# Altium PCB PCB_VS1005-Pico_2024-02-04.pcbdoc
Units mil, origin at the board's own origin, x right, y up, seen from the top; angles counter-clockwise.
Board outline 6145 x 4947 mil, 2 copper layers (Top Layer, Bottom Layer); 83 components, 164 nets, 602 pads, 134 vias.
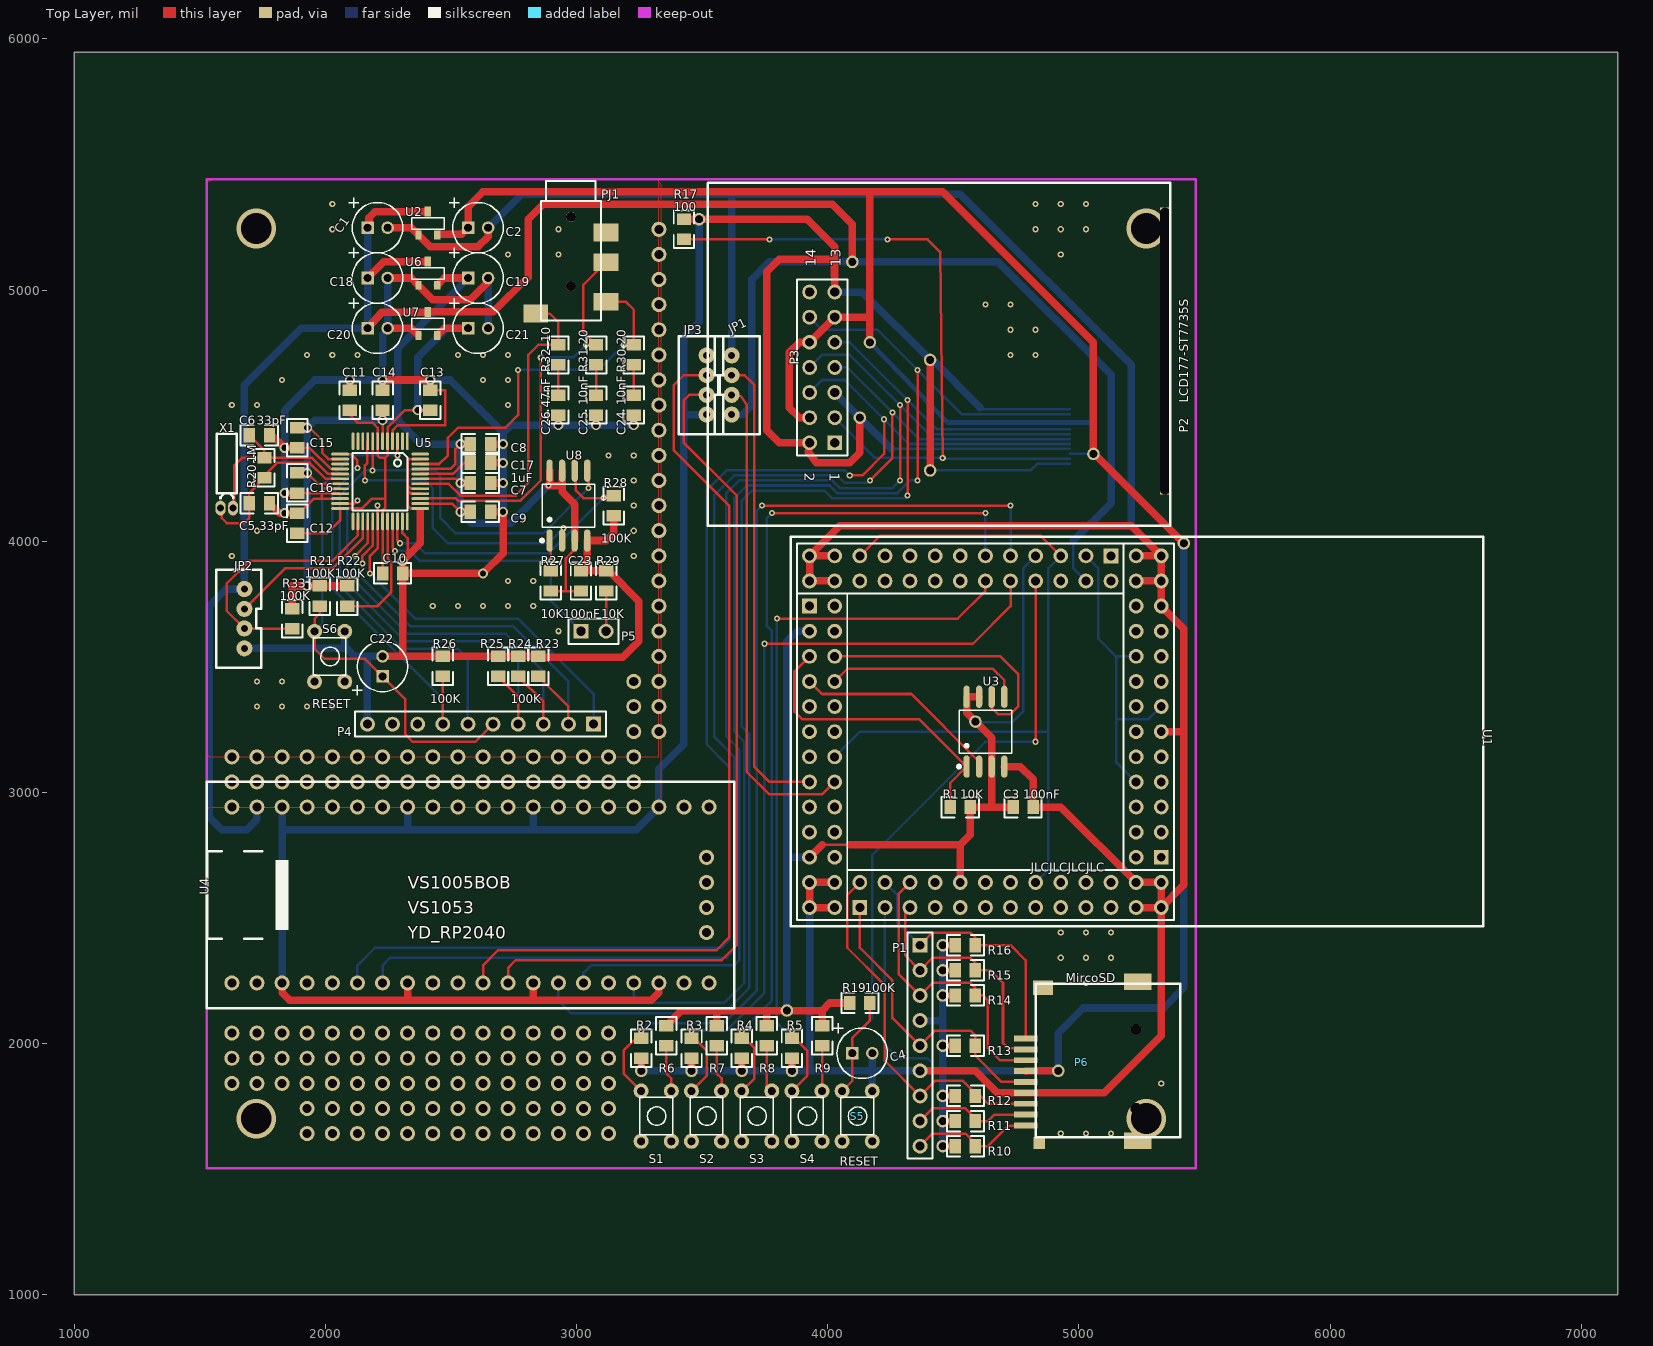
[diagram p0: Top Layer view]
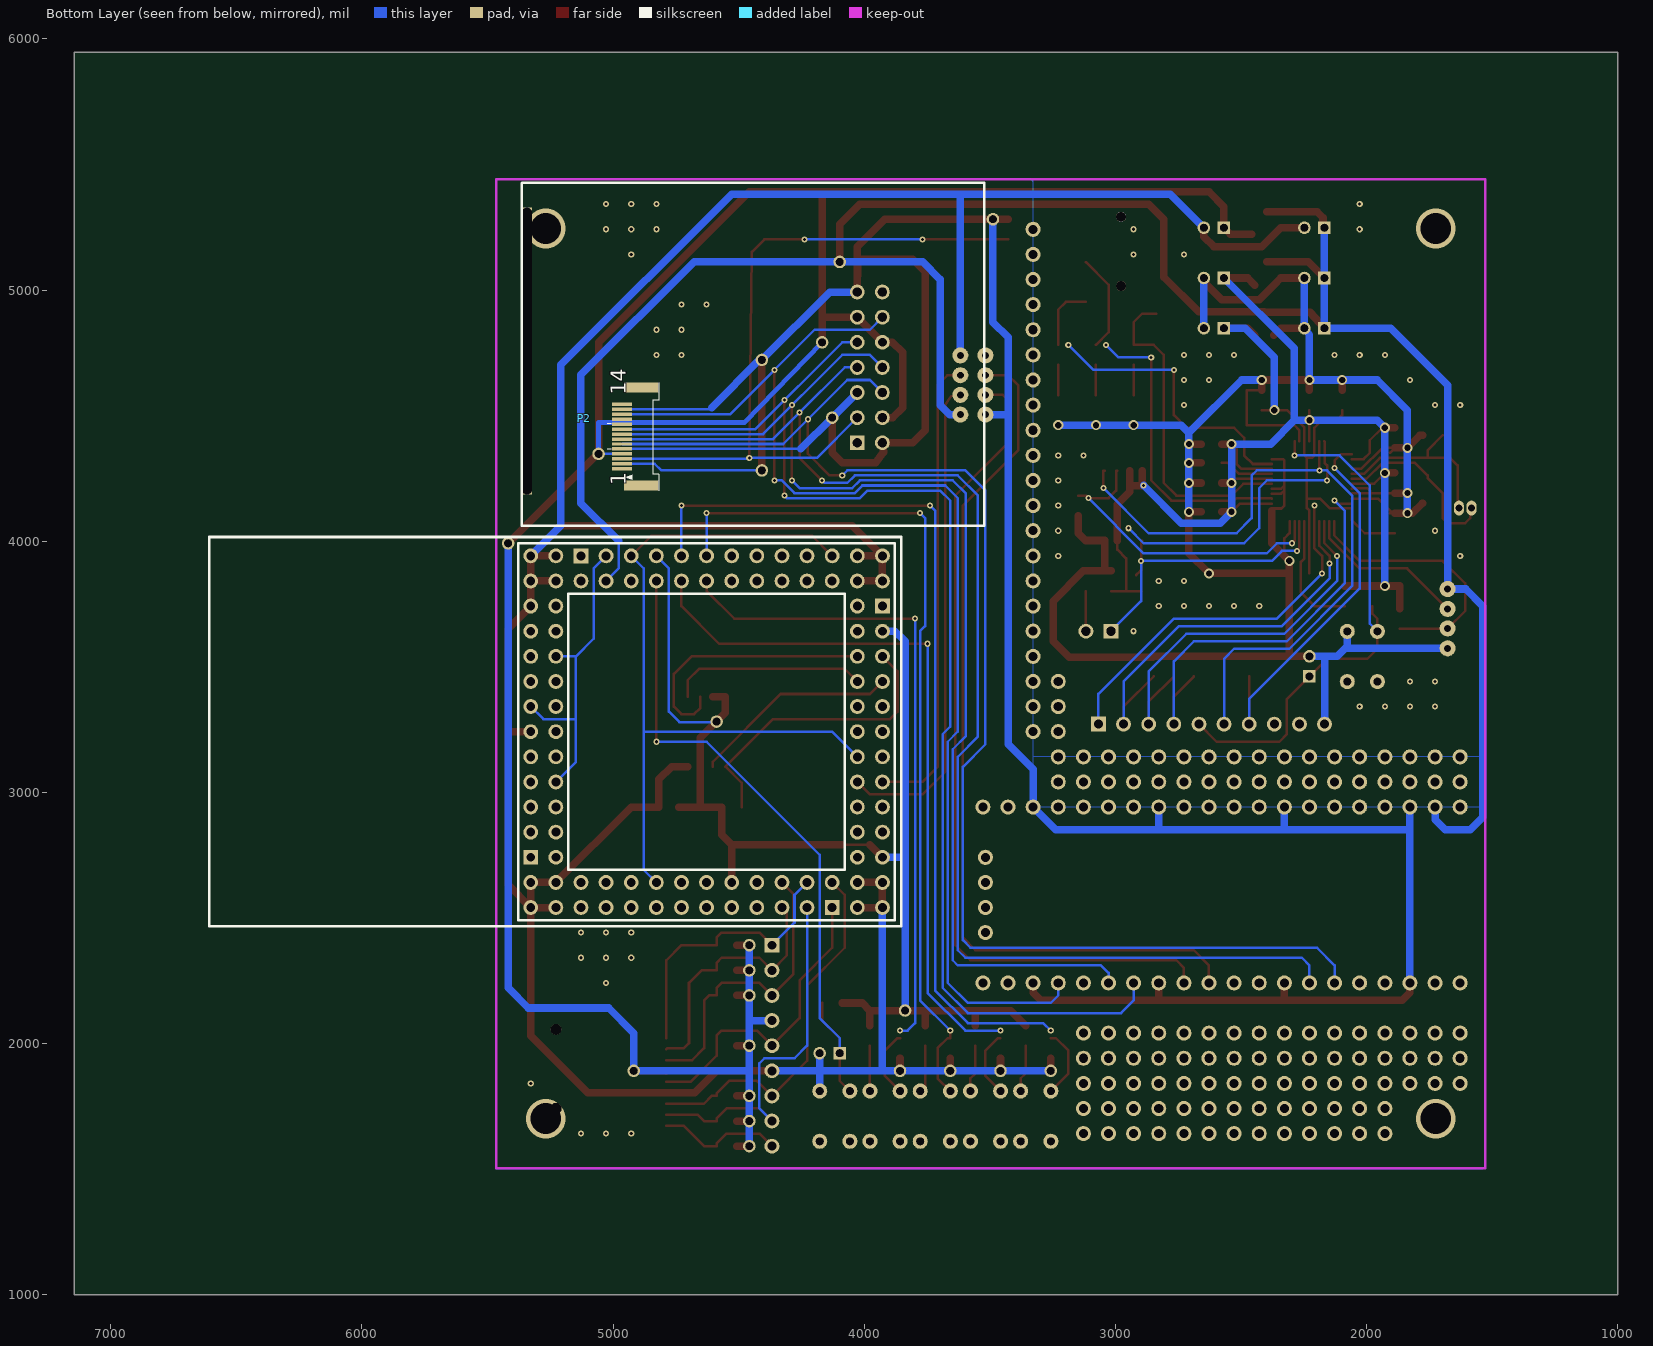
[diagram p1: Bottom Layer view, seen from below]

## Layer stack, top to bottom
Top Layer: signal copper (thickness not stored)
Dielectric: dielectric 12.6, FR-4, Dk 4.8
Bottom Layer: signal copper (thickness not stored)

## Board outline
7145,1000 1000,1000 1000,5947 7145,5947

## Components (designator, comment, footprint, x,y, rotation, side; value= is the part's Value field where it differs from the comment)
C1 "10uF" CAP-DIP 2207.96,5248.08 r0 top
C2 "10uF" CAP-DIP 2607.96,5248.08 r0 top
C3 "100nF" CAP-0805 4777.5,2942 r0 top
C4 "1uF" CAP-DIP 4137.5,1962 r0 top
C5 "33pF" CAP-0805 1737.5,4152 r0 top
C6 "33pF" CAP-0805 1737.5,4422 r0 top
C7 "100nF" CAP-0805 2617.5,4232 r0 top
C8 "100nF" CAP-0805 2617.5,4387 r0 top
C9 "100nF" CAP-0805 2617.5,4117 r0 top
C10 "100nF" CAP-0805 2267.5,3872 r0 top
C11 "100nF" CAP-0805 2097.5,4562 r90 top
C12 "100nF" CAP-0805 1887.5,4072 r90 top
C13 "100nF" CAP-0805 2417.5,4562 r90 top
C14 "100nF" CAP-0805 2227.5,4562 r90 top
C15 "100nF" CAP-0805 1887.5,4412 r270 top
C16 "100nF" CAP-0805 1887.5,4232 r270 top
C17 "1uF" CAP-0805 2617.5,4312 r0 top
C18 "10uF" CAP-DIP 2207.96,5048.08 r0 top
C19 "10uF" CAP-DIP 2607.96,5048.08 r0 top
C20 "10uF" CAP-DIP 2207.96,4848.08 r0 top
C21 "10uF" CAP-DIP 2607.96,4848.08 r0 top
C22 "1uF" CAP-DIP 2227.5,3502 r90 top
C23 "100nF" CAP-0805 3017.5,3842 r90 top
C24 "10nF" CAP-0805 3227.5,4542 r270 top
C25 "10nF" CAP-0805 3077.5,4542 r270 top
C26 "47nF" CAP-0805 2927.5,4542 r270 top
JP1 "UART_VS10XX" UART_VS10XX 3617.5,4622 r270 top
JP2 "UART_VS10XX" UART_VS10XX 1677.5,3692 r90 top
JP3 "UART_PICO" UART_VS10XX 3517.5,4622 r90 top
P1 "Header 9" HDR1X9 4367.5,2392 r270 top
P2 "LCD177-ST7735S" LCD177 4977.45,4442.02 r90 top
P3 "LCD28-ST7789" HDR2X7 4027.5,4392 r90 top
P4 "Header 10" HDR1X10 2617.5,3272 r180 top
P5 "SPIBOOT" HDR1X2 3017.5,3642 r0 top
P6 "MircoSD" MICROSD 5227.5,1742 r0 top
PJ1 "PJ3020D" PJ3020D 2977.5,5292 r270 top
R1 "10K" RES-0805 4527.5,2942 r0 top
R2 "10K" RES-0805 3257.5,1982 r90 top
R3 "10K" RES-0805 3457.5,1982 r90 top
R4 "10K" RES-0805 3657.5,1982 r90 top
R5 "10K" RES-0805 3857.5,1982 r90 top
R6 "10K" RES-0805 3357.5,2032 r90 top
R7 "10K" RES-0805 3557.5,2032 r90 top
R8 "10K" RES-0805 3757.5,2032 r90 top
R9 "10K" RES-0805 3977.5,2032 r90 top
R10 "10K" RES-0805 4547.5,1592 r180 top
R11 "10K" RES-0805 4547.5,1692 r180 top
R12 "10K" RES-0805 4547.5,1792 r180 top
R13 "10K" RES-0805 4547.5,1992 r180 top
R14 "10K" RES-0805 4547.5,2192 r180 top
R15 "10K" RES-0805 4547.5,2292 r180 top
R16 "10K" RES-0805 4547.5,2392 r180 top
R17 "100" RES-0805 3427.5,5242 r270 top
R19 "100K" RES-0805 4127.5,2162 r180 top
R20 "1M" RES-0805 1757.5,4292 r270 top
R21 "100K" RES-0805 1977.5,3782 r90 top
R22 "100K" RES-0805 2087.5,3782 r90 top
R23 "100K" RES-0805 2847.5,3502 r270 top
R24 "100K" RES-0805 2767.5,3502 r270 top
R25 "100K" RES-0805 2687.5,3502 r270 top
R26 "100K" RES-0805 2467.5,3502 r270 top
R27 "10K" RES-0805 2897.5,3842 r270 top
R28 "100K" RES-0805 3147.5,4142 r90 top
R29 "10K" RES-0805 3117.5,3842 r270 top
R30 "20" RES-0805 3227.5,4742 r90 top
R31 "20" RES-0805 3077.5,4742 r90 top
R32 "10" RES-0805 2927.5,4742 r90 top
R33 "100K" RES-0805 1867.5,3692 r90 top
S1 "UP" SW-4.5 3377.5,1812 r180 top
S2 "DOWN" SW-4.5 3577.5,1812 r180 top
S3 "D2" SW-4.5 3777.5,1812 r180 top
S4 "D3" SW-4.5 3977.5,1812 r180 top
S5 "RESET" SW-4.5 4177.5,1812 r180 top
S6 "RESET" SW-4.5 2077.5,3642 r180 top
U1 "VS1005BOB" VS1005BOB 4627.5,3242 r270 top
U2 "VOX6206" VOX6206 2407.96,5298.08 r0 top
U3 "GD25Q16CSIG" SOIC-8_L5.3-W5.3-P1.27-LS8.0-BL 4627.5,3242 r0 top
U4 "YD_RP2040" YD-RP2040 3127.5,2592 r90 top
U5 "VS1053" LQFP-48-VS1053 2227.5,4242 r270 top
U6 "VOX6206-3V3" VOX6206 2407.96,5098.08 r0 top
U7 "VOX6206-1V8" VOX6206 2407.96,4898.08 r0 top
U8 "25LC640" SOIC-8_L5.3-W5.3-P1.27-LS8.0-BL 2967.5,4142 r0 top
X1 "12.288MHz" CRYSTAL-TH_BD2.0-L6.0-P1.27 1607.5,4132 r270 top

## Footprints (in the part's own frame and the unit in brackets; to place one, negate y for a bottom-side part, rotate by r counter-clockwise, add the part's x,y. Pads: shape width x height; smd on the part's side, far side on the other; paste and mask are expansions set on the pad)
CAP-0805 [mm]
  rect 1.16x1.45 smd paste+0 mask+0.102: 1(-1.016,0) 2(1.016,0)
  silkscreen extent -1.9,-1.03 1.87,1.04
CAP-DIP [mil]
  rect 50x50 hole 30 slot 30.2 at 0 deg paste+0 mask+2: 1(-40,0)
  round 50 hole 30 slot 30.2 at 0 deg paste+0 mask+2: 2(40,0)
  silkscreen extent -115,-100 100,120
CRYSTAL-TH_BD2.0-L6.0-P1.27 [mm]
  oval 1.5x1 hole 0.7 paste+0 mask+0.05: 1(0,0.635) 2(0,-0.635)
  silkscreen extent -7.5,-1 -0.98,1
HDR1X2 [mm]
  rect 1.5x1.5 hole 0.9 slot 0.905 at 0 deg paste+0 mask+0.051: 1(0,0)
  round 1.5 hole 0.9 slot 0.905 at 0 deg paste+0 mask+0.051: 2(2.54,0)
  silkscreen extent -1.27,-1.27 3.81,1.27
HDR1X9 [mm]
  rect 1.5x1.5 hole 0.9 paste+0 mask+0.051: 1(0,0)
  round 1.5 hole 0.9 paste+0 mask+0.051: 2(2.54,0) 3(5.08,0) 4(7.62,0) 5(10.16,0) 6(12.7,0) 7(15.24,0) 8(17.78,0) 9(20.32,0)
  silkscreen extent -1.27,-1.27 21.59,1.27
HDR1X10 [mil]
  rect 59x59 hole 36 paste+0 mask+2: 1(-450,0)
  round 59 hole 36 paste+0 mask+2: 2(-350,0) 3(-250,0) 4(-150,0) 5(-50,0) 6(50,0) 7(150,0) 8(250,0) 9(350,0) 10(450,0)
  silkscreen extent -500,-50 500,50
HDR2X7 [mm]
  rect 1.5x1.5 hole 0.9 slot 0.905 at 0 deg paste+0 mask+0.051: 1(0.003,-0.007)
  round 1.5 hole 0.9 slot 0.905 at 0 deg paste+0 mask+0.051: 2(0.003,2.533) 3(2.543,-0.007) 4(2.543,2.533) 5(5.083,-0.007) 6(5.083,2.533) 7(7.623,-0.007) 8(7.623,2.533) 9(10.163,-0.007) 11(12.703,-0.007) 12(12.703,2.533) 13(15.243,-0.007) 14(15.243,2.533)
  round 1.5 hole 0.9 paste+0 mask+0.051: 10(10.163,2.533)
  silkscreen extent -1.27,-1.28 16.51,3.8
LCD177 [mm]
  rect 0.35x2 smd far side paste+0 mask+0.051: 1(-3.892,0.344) 2(-3.392,0.344) 3(-2.892,0.344) 4(-2.392,0.344) 5(-1.892,0.344) 6(-1.392,0.344) 7(-0.892,0.344) 8(-0.392,0.344) 9(0.108,0.344) 10(0.608,0.344) 11(1.108,0.344) 12(1.608,0.344) 13(2.108,0.344) 14(2.608,0.344)
  rect 1x3.5 smd far side paste+0 mask+0.051: 15(4.318,2.286) 16(-5.588,2.286)
  rect 29x1 hole 1 slot 29 at 0 deg paste+0 mask+0.051: 17(8.001,-9.271)
  silkscreen extent -9.65,-9.78 25.02,36.96
LQFP-48-VS1053 [mm]
  oval 1.8x0.28 smd paste+0 mask+0.051: 1(-3.967,2.51) 2(-3.967,2.01) 3(-3.967,1.51) 4(-3.967,1.01) 5(-3.967,0.51) 6(-3.967,0.01) 7(-3.967,-0.49) 8(-3.967,-0.99) 9(-3.967,-1.49) 10(-3.967,-1.99) 11(-3.967,-2.49) 12(-3.967,-2.99) 25(4.133,-2.99) 26(4.133,-2.49) 27(4.133,-1.99) 28(4.133,-1.49) 29(4.133,-0.99) 30(4.133,-0.49) 31(4.133,0.01) 32(4.133,0.51) 33(4.133,1.01) 34(4.133,1.51) 35(4.133,2.01) 36(4.133,2.51)
  oval 0.28x1.8 smd paste+0 mask+0.051: 13(-2.667,-4.29) 14(-2.167,-4.29) 15(-1.667,-4.29) 16(-1.167,-4.29) 17(-0.667,-4.29) 18(-0.167,-4.29) 19(0.333,-4.29) 20(0.833,-4.29) 21(1.333,-4.29) 22(1.833,-4.29) 23(2.333,-4.29) 24(2.833,-4.29) 37(2.833,3.81) 38(2.333,3.81) 39(1.833,3.81) 40(1.333,3.81) 41(0.833,3.81) 42(0.333,3.81) 43(-0.167,3.81) 44(-0.667,3.81) 45(-1.167,3.81) 46(-1.667,3.81) 47(-2.167,3.81) 48(-2.667,3.81)
  silkscreen extent -2.79,-3.05 3.05,2.54
MICROSD [mm]
  rect 2.35x0.6 smd paste+0 mask+0.051: 1(-11.163,7.079) 2(-11.163,5.979) 3(-11.163,4.879) 4(-11.163,3.779) 5(-11.163,2.679) 6(-11.163,1.579) 7(-11.163,0.479) 8(-11.163,-0.621) 9(-11.163,-1.721)
  round 1.092 hole 1.092 slot 1.097 at 0 deg paste+0 mask+0.051: 10(-0.013,0) 11(-0.013,8.001)
  rect 2.794x1.651 smd paste+0 mask+0.051: GND(0.167,-3.251) GND(0.167,12.809)
  rect 1.2x1.2 smd paste+0 mask+0.051: ""(-9.8,-3.5)
  rect 2.032x1.5 smd paste+0 mask+0.051: ""(-9.4,12.2)
  silkscreen extent -10.17,-2.92 4.46,12.59
PJ3020D [mm]
  rect 1.8x2.5 smd paste+0 mask+0.051: 2(1.6,3.55) 3(4.6,3.55) 4(8.6,3.55) 5(9.8,-3.55)
  round 1 hole 1 paste+0 mask+0.051: ""(0,0) ""(7,0)
  silkscreen extent -3.6,-3.05 10.5,3.05
RES-0805 [mm]
  rect 1.16x1.45 smd paste+0 mask+0.102: 1(-1.016,0) 2(1.016,0)
  silkscreen extent -1.9,-1.03 1.87,1.04
SOIC-8_L5.3-W5.3-P1.27-LS8.0-BL [mm]
  oval 0.63x2.25 smd paste+0 mask+0.051: 1(-1.905,-3.53) 2(-0.635,-3.53) 3(0.635,-3.53) 4(1.905,-3.53) 5(1.905,3.53) 6(0.635,3.53) 7(-0.635,3.53) 8(-1.905,3.53)
  silkscreen extent -2.82,-3.68 2.64,2.18
SW-4.5 [mil]
  round 60 hole 30 slot 30.2 at 0 deg paste+0 mask+2: 1(0.5,0.5) 2(120.5,0.5) 3(0.5,200.5) 4(120.5,200.5)
  silkscreen extent -5,26 126,176
UART_VS10XX [mil]
  round 64 hole 27.6 paste+0 mask+2: 1(-118,0) 2(-39,0) 3(39,0) 4(118,0)
  silkscreen extent -195,-67 195,111
VOX6206 [mil]
  rect 25x35 smd paste+0 mask+2: 1(-37.4,-78.74) 2(37.4,-78.74)
  rect 25x40 smd paste+0 mask+2: 3(0,15)
  silkscreen extent -65,-55 65,-10
VS1005BOB [mm]
  rect 1.5x1.5 hole 0.9 paste+0 mask+0.051: 1-1(12.7,17.78) 2-1(-17.78,12.7) 3-1(17.78,-12.7) 4-1(-12.7,-17.78)
  round 1.5 hole 0.9 paste+0 mask+0.051: 1-2(12.7,15.24) 1-3(10.16,17.78) 1-4(10.16,15.24) 1-5(7.62,17.78) 1-6(7.62,15.24) 1-7(5.08,17.78) 1-8(5.08,15.24) 1-9(2.54,17.78) 1-10(2.54,15.24) 1-11(0,17.78) 1-12(0,15.24) 1-13(-2.54,17.78) 1-14(-2.54,15.24) 1-15(-5.08,17.78) 1-16(-5.08,15.24) 1-17(-7.62,17.78) 1-18(-7.62,15.24) 1-19(-10.16,17.78) 1-20(-10.16,15.24) 1-21(-12.7,17.78) 1-22(-12.7,15.24) 1-23(-15.24,17.78) 1-24(-15.24,15.24) 1-25(-17.78,17.78) 1-26(-17.78,15.24) 2-2(-15.24,12.7) 2-3(-17.78,10.16) 2-4(-15.24,10.16) 2-5(-17.78,7.62) 2-6(-15.24,7.62) 2-7(-17.78,5.08) 2-8(-15.24,5.08) 2-9(-17.78,2.54) 2-10(-15.24,2.54) 2-11(-17.78,0) 2-12(-15.24,0) 2-13(-17.78,-2.54) 2-14(-15.24,-2.54) 2-15(-17.78,-5.08) 2-16(-15.24,-5.08) 2-17(-17.78,-7.62) 2-18(-15.24,-7.62) 2-19(-17.78,-10.16) 2-20(-15.24,-10.16) 2-21(-17.78,-12.7) 2-22(-15.24,-12.7) 2-23(-17.78,-15.24) 2-24(-15.24,-15.24) 2-25(-17.78,-17.78) 2-26(-15.24,-17.78) 3-2(15.24,-12.7) 3-3(17.78,-10.16) 3-4(15.24,-10.16) 3-5(17.78,-7.62) 3-6(15.24,-7.62) 3-7(17.78,-5.08) 3-8(15.24,-5.08) 3-9(17.78,-2.54) 3-10(15.24,-2.54) 3-11(17.78,0) 3-12(15.24,0) 3-13(17.78,2.54) 3-14(15.24,2.54) 3-15(17.78,5.08) 3-16(15.24,5.08) 3-17(17.78,7.62) 3-18(15.24,7.62) 3-19(17.78,10.16) 3-20(15.24,10.16) 3-21(17.78,12.7) 3-22(15.24,12.7) 3-23(17.78,15.24) 3-24(15.24,15.24) 3-25(17.78,17.78) 3-26(15.24,17.78) 4-2(-12.7,-15.24) 4-3(-10.16,-17.78) 4-4(-10.16,-15.24) 4-5(-7.62,-17.78) 4-6(-7.62,-15.24) 4-7(-5.08,-17.78) 4-8(-5.08,-15.24) 4-9(-2.54,-17.78) 4-10(-2.54,-15.24) 4-11(0,-17.78) 4-12(0,-15.24) 4-13(2.54,-17.78) 4-14(2.54,-15.24) 4-15(5.08,-17.78) 4-16(5.08,-15.24) 4-17(7.62,-17.78) 4-18(7.62,-15.24) 4-19(10.16,-17.78) 4-20(10.16,-15.24) 4-21(12.7,-17.78) 4-22(12.7,-15.24) 4-23(15.24,-17.78) 4-24(15.24,-15.24) 4-25(17.78,-17.78) 4-26(17.78,-15.24)
  silkscreen extent -19.69,-19.69 19.69,50.31
YD-RP2040 [mil]
  round 60 hole 36 paste+0 mask+2: 1(-350,1500) 2(-350,1400) 3(-350,1300) 4(-350,1200) 5(-350,1100) 6(-350,1000) 7(-350,900) 8(-350,800) 9(-350,700) 10(-350,600) 11(-350,500) 12(-350,400) 13(-350,300) 14(-350,200) 15(-350,100) 16(-350,0) 17(-350,-100) 18(-350,-200) 19(-350,-300) 20(-350,-400) 21(350,-400) 22(350,-300) 23(350,-200) 24(350,-100) 25(350,0) 26(350,100) 27(350,200) 28(350,300) 29(350,400) 30(350,500) 31(350,600) 32(350,700) 33(350,800) 34(350,900) 35(350,1000) 36(350,1100) 37(350,1200) 38(350,1300) 39(350,1400) 40(350,1500) 41(-150,-390) 42(-50,-390) 43(50,-390) 44(150,-390)
  silkscreen extent -450,-500 450,1600

## Free pads (board coordinates)
  round 60 hole 36 paste+0 mask+2: 1(1627.5,1842) 1(1627.5,1942) 1(1627.5,2042) 1(1627.5,3042) 1(1627.5,3142) 1(1727.5,1842) 1(1727.5,1942) 1(1727.5,2042) 1(1727.5,3042) 1(1727.5,3142) 1(1827.5,1842) 1(1827.5,1942) 1(1827.5,2042) 1(1827.5,3042) 1(1827.5,3142) 1(1927.5,1642) 1(1927.5,1742) 1(1927.5,1842) 1(1927.5,1942) 1(1927.5,2042) 1(1927.5,3042) 1(1927.5,3142) 1(2027.5,1642) 1(2027.5,1742) 1(2027.5,1842) 1(2027.5,1942) 1(2027.5,2042) 1(2027.5,3042) 1(2027.5,3142) 1(2127.5,1642) 1(2127.5,1742) 1(2127.5,1842) 1(2127.5,1942) 1(2127.5,2042) 1(2127.5,3042) 1(2127.5,3142) 1(2227.5,1642) 1(2227.5,1742) 1(2227.5,1842) 1(2227.5,1942) 1(2227.5,2042) 1(2227.5,3042) 1(2227.5,3142) 1(2327.5,1642) 1(2327.5,1742) 1(2327.5,1842) 1(2327.5,1942) 1(2327.5,2042) 1(2327.5,3042) 1(2327.5,3142) 1(2427.5,1642) 1(2427.5,1742) 1(2427.5,1842) 1(2427.5,1942) 1(2427.5,2042) 1(2427.5,3042) 1(2427.5,3142) 1(2527.5,1642) 1(2527.5,1742) 1(2527.5,1842) 1(2527.5,1942) 1(2527.5,2042) 1(2527.5,3042) 1(2527.5,3142) 1(2627.5,1642) 1(2627.5,1742) 1(2627.5,1842) 1(2627.5,1942) 1(2627.5,2042) 1(2627.5,3042) 1(2627.5,3142) 1(2727.5,1642) 1(2727.5,1742) 1(2727.5,1842) 1(2727.5,1942) 1(2727.5,2042) 1(2727.5,3042) 1(2727.5,3142) 1(2827.5,1642) 1(2827.5,1742) 1(2827.5,1842) 1(2827.5,1942) 1(2827.5,2042) 1(2827.5,3042) 1(2827.5,3142) 1(2927.5,1642) 1(2927.5,1742) 1(2927.5,1842) 1(2927.5,1942) 1(2927.5,2042) 1(2927.5,3042) 1(2927.5,3142) 1(3027.5,1642) 1(3027.5,1742) 1(3027.5,1842) 1(3027.5,1942) 1(3027.5,2042) 1(3027.5,3042) 1(3027.5,3142) 1(3127.5,1642) 1(3127.5,1742) 1(3127.5,1842) 1(3127.5,1942) 1(3127.5,2042) 1(3127.5,3042) 1(3127.5,3142) 1(3227.5,3042) 1(3227.5,3142) 1(3227.5,3242) 1(3227.5,3342) 1(3227.5,3442) 1(3327.5,3242) 1(3327.5,3342) 1(3327.5,3442) 1(3327.5,3542) 1(3327.5,3642) 1(3327.5,3742) 1(3327.5,3842) 1(3327.5,3942) 1(3327.5,4042) 1(3327.5,4142) 1(3327.5,4242) 1(3327.5,4342) 1(3327.5,4442) 1(3327.5,4542) 1(3327.5,4642) 1(3327.5,4742) 1(3327.5,4842) 1(3327.5,4942) 1(3327.5,5042) 1(3327.5,5142) 1(3327.5,5242)
  round 50 hole 30 slot 30.2 at 0 deg paste+0 mask+2: 2(3257.5,1892) 2(3457.5,1892) 2(3487.5,5282) 2(3657.5,1892) 2(3837.5,2132) 2(3857.5,1892) 2(4457.5,1592) 2(4457.5,1692) 2(4457.5,1792) 2(4457.5,1992) 2(4457.5,2192) 2(4457.5,2292) 2(4457.5,2392) 2(4587.5,3282) 2(4917.5,1892) 2(5057.5,4347.8)
  round 50 hole 30 slot 30.2 at 90 deg paste+0 mask+2: 2(4097.5,5112) 2(4127.5,4492) 2(4167.5,4792) 2(4407.5,4282) 2(4407.5,4722) 2(5417.5,3992)

## Via types
v1: diameter 24.41, hole 12.2, Top Layer to Bottom Layer, tented both sides, 103 vias
v2: diameter 40, hole 25, Top Layer to Bottom Layer, tented both sides, 23 vias
v3: diameter 157.48, hole 122.05, Top Layer to Bottom Layer, tented both sides, 4 vias
v4: diameter 24, hole 12, Top Layer to Bottom Layer, tented both sides, 4 vias

## Nets (pads, with @x,y where several pads share a name; then routed paths per layer and width w, separated by ;. In a path a pad name is that pad's centre, name@x,y a point inside that pad or via, vN(x,y) a via of type N, cw(c..) or ccw(c..) an arc to the next point about the centre after c; other vN are vias at no path point)
+3V3: C2.1 P1.4 P2.4 P2.10 P2.11 P3.4 P3.10 P3.11 P6.4 pad.2@4167.5,4792 pad.2@4457.5,1592 pad.2@4457.5,1692 pad.2@4457.5,1792 pad.2@4457.5,1992 pad.2@4457.5,2192 pad.2@4457.5,2292 pad.2@4457.5,2392 pad.2@4917.5,1892 pad.2@5057.5,4347.8 pad.2@5417.5,3992 R10.2 R11.2 R12.2 R13.2 R14.2 R15.2 R16.2 U2.2 | length 10803.7
  Top Layer w10: C2.1@2549.96,5248.08 C2.1
  Top Layer w30: U2.2@2457.5,5222 2541.9,5222 C2.1 2568,5332.5 2627.5,5392 4167.5,5392 ; P3.10 P3.11 ; P3.4 3887.4,4492.1 3847.5,4532 3847.5,4752 3887.6,4792.1 P3.10 ; P3.11 4167.5,4892.1 ; pad.2@4167.5,4792 4167.5,4892.1 ; 4167.5,4892 4167.5,4892.1 ; pad.2@4457.5,1592 R10.2 ; pad.2@4457.5,1692 R11.2 ; pad.2@4457.5,1792 R12.2 ; pad.2@4457.5,1992 R13.2 ; pad.2@4457.5,2192 R14.2 ; pad.2@4457.5,2292 R15.2 ; pad.2@4457.5,2392 R16.2 ; P6.4 4789.24,1892 pad.2@4917.5,1892 ; pad.2@5057.5,4347.8 5057.5,4792 4457.5,5392 4167.5,5392 ; pad.2@5057.5,4352 pad.2@5413.3,3996.2 ; 4167.5,4892.1 4167.5,5392
  Bottom Layer w10: P2.4@4963.9,4347.85 pad.2@5057.5,4347.85
  Bottom Layer w20: pad.2@4167.5,4792 4477.5,4472 5057.5,4472 pad.2@5057.5,4347.85
  Bottom Layer w30: P1.4 4457.5,2092 ; 4457.17,2092 4457.5,2091.67 ; pad.2@4457.5,1592 4457.5,1692 4457.5,1792 4457.5,1992 4457.5,2192 4457.5,2292 pad.2@4457.5,2392 ; 4457.5,1894.5 4457.5,1892 4917.5,1892 4917.5,2042 5017.5,2142 5337.5,2142 5417.5,2222 pad.2@5417.5,3992 ; pad.2@5057.5,4347.8 pad.2@5061.7,4347.8
AVDD: U1.1-8 U1.1-13 U1.1-18 U1.2-3 | length 1263.6
  Bottom Layer w10: U1.2-3 5077.5,3892 5077.5,3612 5147.5,3542 ; U1.1-8 5147.5,3122 5147.5,3292 ; U1.1-18 5147.5,3542 ; U1.1-13 5277.5,3292 5212.3,3292 5147.5,3292 ; 5147.5,3292 5147.5,3542
C24_1: C24.1 R30.1 | length 120
  Top Layer w10: C24.1 R30.1
C25_1: C25.1 R31.1 | length 120
  Top Layer w10: C25.1 R31.1
C26_1: C26.1 R32.1 | length 120
  Top Layer w10: C26.1 R32.1
CMD: P1.3 P6.3 R14.1 U1.3-6 | length 1202.1
  Top Layer w10: U1.3-6 4281.79,2596.29 4281.79,2277.71 P1.3 4417.5,2242 4567.5,2242 4587.5,2222 R14.1 4617.5,2192 4637.5,2172 4637.5,1982 4685.41,1934.09 P6.3
CS: P2.12 P3.12 U4.17 | length 4902.3
  Top Layer w10: v1(4357.5,4242) v1(4357.5,4682)
  Bottom Layer w10: U4.17 3227.5,2192 3257.5,2162 3587.5,2162 3667.5,2242 3667.5,3202 3627.5,3242 3627.5,4172 3677.5,4222 4007.5,4222 4037.5,4192 4277.5,4192 4327.5,4242 v1(4357.5,4242) ; P3.12 3977.8,4842.1 4197.4,4842.1 4534.2,4505.3 P2.12
CVDD: U1.2-5 U1.2-21 U1.3-16 U1.4-14 | length 3099.1
  Top Layer w10: U1.2-21 4207.5,4022 4847.5,4022 U1.2-5
  Bottom Layer w10: U1.4-14 4127.5,3242 4877.5,3242 ; U1.3-16 4877.5,2692.2 4877.5,3892 U1.2-5
D0: R2.2 S1.2 U1.2-9 | length 3934.6
  Top Layer w10: S1.2 3187.5,1881 3187.5,1972 3237.5,2022 R2.2 ; v1(3737.5,4142) v1(4727.5,4142)
  Bottom Layer w10: v1(3257.5,2052) 3287.5,2082 3587.5,2082 3717.5,2212 3717.5,4122 v1(3737.5,4142) ; U1.2-9 v1(4727.5,4142)
D1: R3.2 S2.2 U1.2-10 | length 3150.5
  Top Layer w10: S2.2 3517.5,1872 3517.5,1972 3467.5,2022 R3.2 ; v1(3747.5,3592) 4577.5,3592 4727.5,3742 U1.2-10
  Bottom Layer w10: v1(3457.5,2052) 3597.5,2052 3747.5,2202 v1(3747.5,3592)
D2: R4.2 S3.2 U1.2-11 | length 3434.3
  Top Layer w10: S3.2 3707.5,1862 3707.5,1982 3667.5,2022 R4.2 v1(3657.5,2052) ; v1(3777.5,4112) v1(4627.5,4112)
  Bottom Layer w10: v1(3657.5,2052) 3777.5,2172 3777.5,3642 3757.5,3662 3757.5,4092 v1(3777.5,4112) ; U1.2-11 v1(4627.5,4112)
D3: R5.2 S4.2 U1.2-12 | length 2864.3
  Top Layer w10: v1(3797.5,3692) 4517.5,3692 4627.5,3802 U1.2-12 ; S4.2 3917.5,1872 3917.5,1972 3867.5,2022 R5.2
  Bottom Layer w10: v1(3797.5,3692) 3797.5,2082 3827.5,2052 v1(3857.5,2052)
DC: P2.7 P3.7 U4.7 | length 5369.2
  Top Layer w10: v1(4167.5,4242) 4257.5,4332 v1(4257.5,4512)
  Bottom Layer w10: U4.7 2227.5,2312 2257.5,2342 3597.5,2342 3627.5,2372 3627.5,3142 3547.5,3222 3547.5,4182 3627.5,4262 4037.5,4262 4067.5,4232 4157.5,4232 v1(4167.5,4242) ; P3.7 4077.4,4692.1 v1(4257.5,4512) 4362.6,4406.9 P2.7
GND: C1.2 C2.2 C3.2 C4.2 JP1.1 P1.6 P6.6 pad.2@3257.5,1892 pad.2@3457.5,1892 pad.2@3657.5,1892 pad.2@3857.5,1892 R2.1 R3.1 R4.1 R5.1 S5.1 U1.1-11 U1.1-21 U1.1-23 U1.1-24 U1.1-25 U1.1-26 U1.2-23 U1.2-24 U1.2-25 U1.2-26 U1.3-23 U1.3-24 U1.3-25 U1.3-26 U1.4-23 U1.4-24 U1.4-25 U1.4-26 U2.1 U3.4 | length 14203.3
  Top Layer w10: P6.6 4845.29,1804.17
  Top Layer w30: C1.2 2341.8,5248.1 U2.1 2417.9,5172 2607.5,5172 2648,5212.5 C2.2 ; pad.2@3257.5,1892 R2.1 ; pad.2@3457.5,1892 R3.1 ; pad.2@3657.5,1892 R4.1 ; pad.2@3857.5,1892 R5.1 ; U1.4-26 U1.4-25 U1.4-23 U1.4-24 ; U1.2-24 U1.2-26 U1.2-25 ; U1.2-23 U1.2-25 ; P1.6 4587.5,1892 4675.3,1804.2 4845.3,1804.2 5099.7,1804.2 5327.5,2032 U1.3-25 ; U3.4 4766.48,3103.02 4817.5,3052 C3.2 4927.5,2942 U1.3-24 U1.3-26 U1.3-25 ; U1.3-23 U1.3-25 ; U1.1-24 U1.1-23 ; U1.1-26 U1.1-25 ; U1.2-25 4047.5,4062 5207.5,4062 U1.1-25 ; U1.3-25 5417.5,2632 5417.5,3242 ; U1.1-23 U1.1-21 5417.5,3652 5417.5,3242 ; U1.1-23 U1.1-25 ; 5417.5,3242 U1.1-11 5417.5,3242
  Bottom Layer w30: C2.2 2781.9,5382 3617.5,5382 ; pad.2@3257.5,1892 3457.5,1892 3657.5,1892 3857.5,1892 4177.5,1892 ; JP1.1 3617.5,5382 ; 3617.5,5274 3617.5,5382 ; U1.4-25 3927.5,1892 4177.5,1892 ; S5.1 4177.5,1812 C4.2 ; P1.6 4177.5,1892 ; U1.1-25 5207.5,4062 5207.5,4702 4527.5,5382 3617.5,5382 ; 4177.5,1892 C4.2 ; 4177.5,1892 C4.2 ; 4177.5,1892 C4.2
  other v1: 4927.5,1642 5027.5,1642 5127.5,1642 5327.5,1842 5027.5,2242 4927.5,2342 5027.5,2342 5127.5,2342 4927.5,2442 5027.5,2442 5127.5,2442 4727.5,4742 4827.5,4742 4727.5,4842 4827.5,4842 4627.5,4942 4727.5,4942 4927.5,5142 4827.5,5242 4927.5,5242 5027.5,5242 4827.5,5342 4927.5,5342 5027.5,5342
IOVDD: C3.1 pad.2@3837.5,2132 pad.2@4587.5,3282 R1.2 R6.2 R7.2 R8.2 R9.2 R19.2 U1.2-7 U1.3-10 U1.4-3 U1.4-21 U3.3 U3.7 U3.8 | length 5265
  Top Layer w10: 3977.5,2792 4087.5,2792 ; R19.2@4070.58,2162 R19.2
  Top Layer w30: R6.2 3417.5,2132 3977.5,2132 ; R7.2 3557.5,2112 3557.5,2132 ; R8.2 3757.5,2112 3757.5,2132 ; U1.4-21 3977.5,2792 ; R19.2 4007.5,2162 3977.5,2132 ; 4087.5,2792 4527.5,2792 ; U1.3-10 4527.5,2792 ; U3.7 U3.8 4552.5,3317 4652.5,3217 U3.3 4652.5,2942 ; C3.1 R1.2 4567.5,2832 4527.5,2792 ; 3977.5,2132 R9.2 3977.5,2132
  Bottom Layer w10: pad.2@4589.2,3280.3 4735.8,3280.3 4777.5,3322 4777.5,3892 U1.2-7
  Bottom Layer w30: pad.2@3837.5,2132 3837.5,2742 ; U1.4-3 3877.8,3642.3 3837.5,3602.5 3837.5,2742 ; 3837.5,2742 U1.4-21 3837.5,2742
JP1_2: JP1.2 U1.4-15 | length 1871
  Top Layer w10: JP1.2 3668.5,4661 3707.5,4622 3707.5,3102 3767.5,3042 U1.4-15
JP1_3: JP1.3 U1.4-16 | length 1947.4
  Top Layer w10: JP1.3 3654.2,4576.7 3677.5,4543.6 3677.5,3082 3767.5,2992 3977.7,2992 U1.4-16
JP3_4: JP3.4
MISO0: U1.4-7 U3.2 | length 826.8
  Top Layer w10: U1.4-7 3977.5,3392 4332.89,3392 4602.5,3122.39 U3.2
MOSI0: U1.4-8 U3.5 | length 780.4
  Top Layer w10: U1.4-8 4077.5,3492 4657.5,3492 4702.5,3447 U3.5
MOSI1: P2.8 P3.8 U4.15 | length 4786.5
  Top Layer w10: v1(4287.5,4242) 4287.5,4312 v1(4287.5,4542)
  Bottom Layer w10: U4.15 3027.5,2282 3057.5,2312 3627.5,2312 3647.5,2332 3647.5,3172 3595,3224.5 3595,4189.5 3647.5,4242 4017.5,4242 4047.5,4212 4257.5,4212 v1(4287.5,4242) ; P3.8 3977.6,4742 4087.5,4742 4402.9,4426.6 P2.8
P2_1: P2.1
P2_14: P2.14
P3_1: P3.1
P3_14: P3.14
P4_8: P4.8
P4_9: P4.9
PICO-GND: JP3.1 P2.2 P2.5 P2.13 P3.2 P3.5 P3.13 pad.2@3487.5,5282 pad.2@4127.5,4492 pad.2@4407.5,4282 pad.2@4407.5,4722 R17.1 U4.3 U4.8 U4.13 U4.18 U4.23 U4.28 U4.33 U4.38 | length 12742.4
  Top Layer w30: U4.3 1827.5,2202 1857.5,2172 2327.5,2172 ; U4.18 3327.5,2202 3297.5,2172 2827.5,2172 ; R17.1 3487.5,5282 3917.5,5282 4027.5,5172 4027.5,5052 ; 4026.5,5112 P3.13 ; 4026.5,5122 3807.5,5122 3757.5,5072 3757.5,4442 3807.4,4392.1 P3.2 3922.6,4355 3955,4312 4087.5,4312 4127.5,4352 pad.2@4127.5,4492 ; pad.2@4407.5,4282 pad.2@4407.5,4722 ; 2327.5,2172 U4.8 2327.5,2172 ; 2327.5,2172 2827.5,2172 ; 2827.5,2172 U4.13 2827.5,2172
  Bottom Layer w10: 4251.96,4367.54 P2.5 ; pad.2@4407.5,4282 4807.5,4282 4834,4308.5 P2.2 ; 4607.9,4525 P2.13
  Bottom Layer w30: U4.3@1837.5,2242 1827.5,2252 U4.38 1827.5,2852 2327.5,2852 ; pad.2@3487.5,5282 3487.5,4872 3427.5,4812 3427.5,4504 ; P3.5 4127.5,4492.37 4127.5,4492 4251.96,4367.54 ; P3.13 4137.4,4992.1 4407.5,4722 4417.5,4722 4607.5,4532 ; 2327.5,2852 U4.33 2327.5,2852 ; 2327.5,2852 2827.5,2852 ; 2827.5,2852 U4.28 2827.5,2852 ; 2827.5,2852 3238.4,2852 U4.23 3327.5,3091.6 3427.5,3191.6 3427.5,4504 ; 3427.5,4504 JP3.1 3427.5,4504
PICO-RX: JP3.2 U4.12 | length 3373
  Top Layer w10: U4.12 2727.5,2302 2757.5,2332 3577.5,2332 3637.5,2392 3637.5,4182 3427.5,4392 3427.5,4562 3448.5,4583 JP3.2@3527.5,4583
PICO-TX: JP3.3 U4.11 | length 3532.8
  Top Layer w10: U4.11 2627.5,2312 2687.5,2372 3557.5,2372 3607.5,2422 3607.5,2862 3607.5,2872 3607.5,4142 3387.5,4362 3387.5,4622 3426.5,4661 JP3.3
PJ1_2: PJ1.2
R6_1: R6.1 S1.1 | length 188.6
  Top Layer w10: R6.1 3357.5,1882 3377,1862.5 S1.1
R7_1: R7.1 S2.1 | length 188.6
  Top Layer w10: R7.1 3557.5,1882 3577,1862.5 S2.1
R8_1: R8.1 S3.1 | length 188.6
  Top Layer w10: R8.1 3757.5,1831 S3.1
R9_1: R9.1 S4.1 | length 180.5
  Top Layer w10: S4.1 R9.1
R17_2: P2.3 P3.3 R17.2 | length 2864.8
  Top Layer w10: R17.2 v1(3767.5,5202) ; v1(4237.5,5202) 4397.5,5202 4447.5,5152 v1(4457.5,4332)
  Bottom Layer w10: v1(3767.5,5202) v1(4237.5,5202) ; P3.3 4187.9,4332 v1(4457.5,4332) 4461.33,4328.17 P2.3
R29_2: P5.2 R29.2 | length 160
  Top Layer w10: P5.2 R29.2
RESET: P2.6 P3.6 U4.6 | length 5501.9
  Top Layer w10: v1(4087.5,4262) 4137.5,4262 4223.8,4348.3 v1(4223.77,4485.73)
  Bottom Layer w10: U4.6 2127.5,2312 2197.5,2382 3577.5,2382 3607.5,2412 3607.5,3102 3517.5,3192 3517.5,4202 3597.5,4282 4067.5,4282 v1(4087.5,4262) ; P3.6 3977.7,4642 4067.5,4642 v1(4223.77,4485.73) 4322.3,4387.2 P2.6
SCK: P1.5 P6.5 R13.1 U1.3-1 | length 1226.3
  Top Layer w10: U1.3-1 4127.5,2382 4257.5,2252 4257.5,2102 P1.5 4427.5,2052 4567.5,2052 4587.5,2032 R13.1 4587.5,1952 4692,1847.5 P6.5
SCLK0: U1.4-6 U3.6 | length 1060.8
  Top Layer w10: U1.4-6 4687.5,3542 4757.5,3472 4757.5,3342 4727.5,3312 4677.5,3312 4652.5,3337 U3.6
SCLK1: P2.9 P3.9 U4.14 | length 4997
  Top Layer w10: v1(4317.5,4182) v1(4317.5,4562)
  Bottom Layer w10: U4.14 2927.5,2172 2977.5,2122 3587.5,2122 3687.5,2222 3687.5,3232 3657.5,3262 3657.5,4162 3697.5,4202 3987.5,4202 4017.5,4172 4307.5,4172 v1(4317.5,4182) ; P3.9 4087.4,4792.1 4433.2,4446.3 P2.9
SD0: P1.7 P6.7 R12.1 U1.3-2 | length 1479.8
  Top Layer w10: U1.3-2 4077.5,2592 4077.5,2382 4227.5,2232 4227.5,1932 P1.7 4427.5,1852 4537.5,1852 4587.5,1802 R12.1 4607.5,1792 4638.6,1760.9 P6.7
SD1: P1.8 P6.8 R11.1 U1.3-3 | length 1498
  Top Layer w10: P1.8 4417.5,1742 4547.5,1742 4587.5,1702 R11.1 4637.5,1692 4663.1,1717.5 P6.8@4788,1717.5
  Bottom Layer w10: U1.3-3 4227.5,1992 4277.5,1942 4397.5,1942 4417.5,1922 4417.5,1742 P1.8
SD2: P1.1 P6.1 R16.1 U1.3-4 | length 1123.3
  Top Layer w10: P1.1 4417.5,2442 4567.5,2442 4587.5,2422 R16.1 4727.5,2392 4788,2331.5 P6.1
  Bottom Layer w10: U1.3-4 4277.5,2592 4277.5,2482 P1.1
SD3: P1.2 P6.2 R15.1 U1.3-5 | length 1033.5
  Top Layer w10: U1.3-5 4307.5,2522 4307.5,2352 P1.2 4417.5,2342 4567.5,2342 4587.5,2322 R15.1 4647.5,2292 4697.5,2242 4697.5,2002 4717.5,1982 4783.4,1982 P6.2
U1_1-1: U1.1-1
U1_1-2: U1.1-2
U1_1-3: U1.1-3
U1_1-4: U1.1-4
U1_1-5: U1.1-5
U1_1-6: U1.1-6
U1_1-7: U1.1-7
U1_1-9: U1.1-9
U1_1-10: U1.1-10
U1_1-12: U1.1-12
U1_1-14: U1.1-14
U1_1-15: U1.1-15
U1_1-16: U1.1-16
U1_1-17: U1.1-17
U1_1-19: U1.1-19
U1_1-20: U1.1-20
U1_1-22: U1.1-22
U1_2-1: U1.2-1
U1_2-2: U1.2-2
U1_2-6: U1.2-6
U1_2-13: U1.2-13
U1_2-14: U1.2-14
U1_2-15: U1.2-15
U1_2-16: U1.2-16
U1_2-17: U1.2-17
U1_2-18: U1.2-18
U1_2-19: U1.2-19
U1_2-20: U1.2-20
U1_2-22: U1.2-22
U1_3-7: U1.3-7
U1_3-8: U1.3-8
U1_3-9: U1.3-9
U1_3-11: U1.3-11
U1_3-12: U1.3-12
U1_3-13: U1.3-13
U1_3-14: U1.3-14
U1_3-15: U1.3-15
U1_3-17: U1.3-17
U1_3-18: U1.3-18
U1_3-19: U1.3-19
U1_3-20: U1.3-20
U1_3-21: U1.3-21
U1_3-22: U1.3-22
U1_4-1: U1.4-1
U1_4-2: U1.4-2
U1_4-4: U1.4-4
U1_4-9: U1.4-9
U1_4-10: U1.4-10
U1_4-11: U1.4-11
U1_4-12: U1.4-12
U1_4-13: U1.4-13
U1_4-17: U1.4-17
U1_4-18: U1.4-18
U1_4-19: U1.4-19
U1_4-20: U1.4-20
U1_4-22: U1.4-22
U4_1: U4.1
U4_2: U4.2
U4_4: U4.4
U4_5: U4.5
U4_9: U4.9
U4_10: U4.10
U4_16: U4.16
U4_19: U4.19
U4_20: U4.20
U4_21: U4.21
U4_22: U4.22
U4_24: U4.24
U4_25: U4.25
U4_26: U4.26
U4_27: U4.27
U4_29: U4.29
U4_30: U4.30
U4_31: U4.31
U4_32: U4.32
U4_34: U4.34
U4_35: U4.35
U4_36: U4.36
U4_37: U4.37
U4_40: U4.40
U4_41: U4.41
U4_42: U4.42
U4_43: U4.43
U4_44: U4.44
U5_1: U5.1
U5_2: U5.2
U5_3: C22.1 P4.5 R21.1 S6.2 U5.3 | length 2152
  Top Layer w10: S6.2 1957,3691.5 1977.5,3712 R21.1 ; S6.2@1957.5,3641.5 1957.5,3572 1997.5,3532 2157.5,3532 C22.1 2317.5,3372 2317.5,3232 2347.5,3202 2597.5,3202 P4.5 ; U5.3 2286.95,4342.55 v4(2287.5,4342)
  Bottom Layer w10: S6.2 1987.5,3672 1987.5,4222 2107.5,4342 v4(2287.5,4342)
U5_8: P4.6 U5.8 U8.5 | length 2749.8
  Top Layer w10: v4(2187.5,4282) 2188.5,4283 2188.5,4343 U5.8 ; U8.5 3047.5,4280.98 v1(3047.5,4212)
  Bottom Layer w10: P4.6 2567.5,3532 2527.5,3572 2307.5,3572 2057.5,3822 2057.5,4182 2157.5,4282 v4(2187.5,4282) 2437.5,4282 2457.5,4262 2457.5,4092 2517.5,4032 2867.5,4032 v1(3047.5,4212)
U5_9: U5.9 U8.2 | length 1173
  Top Layer w10: v1(2157.5,4242) 2157.5,4302 2167.5,4312 2167.5,4396.84 U5.9
  Bottom Layer w10: v1(2157.5,4242) 2397.5,4242 2427.5,4212 2427.5,4052 2487.5,3992 2887.5,3992 v1(2947.5,4052)
U5_10: U5.10
U5_11: U5.11
U5_12: U5.12
U5_13: P4.7 R26.2 U5.13 | length 1542.8
  Top Layer w10: U5.13 2102.3,4347 2127.5,4321.8 v4(2127.5,4292) ; P4.7 R26.2
  Bottom Layer w10: v4(2127.5,4292) 2027.5,4192 2027.5,3812 2467.5,3372 P4.7
U5_15: U5.15
U5_17: C6.1 R20.1 U5.17 X1.1 | length 746.9
  Top Layer w10: X1.1 1637.5,4137 1637.5,4302 1667.5,4332 R20.1 ; C6.1 1757.5,4362 R20.1 ; U5.17 2011.24,4268.26 1947.5,4332 R20.1
U5_18: C5.1 R20.2 U5.18 X1.2 | length 714.2
  Top Layer w10: X1.2 1587.5,4132 1587.5,4092 1607.5,4072 1677.5,4072 1697.5,4092 C5.1 1697.5,4192 R20.2 1757.5,4262 1807.5,4312 1937.5,4312 2000.5,4249 U5.18@2058.5,4249
U5_23: P4.4 R25.2 U5.23 | length 1701.9
  Top Layer w10: U5.23@2058.6,4150.15 2115.65,4150.15 v1(2127.5,4162) ; R25.2 2767.5,3382 P4.4
  Bottom Layer w10: v1(2127.5,4162) 2087.5,4122 2087.5,3832 2317.5,3602 2687.5,3602 2767.5,3522 P4.4
U5_25: U5.25
U5_26: JP2.2 R33.1 U5.26 | length 1055.2
  Top Layer w10: R33.1 1678.5,3652 JP2.2 1607.5,3723 1607.5,3832 1697.5,3922 2027.5,3922 2129.5,4024 U5.26
U5_27: JP2.3 U5.27 | length 654.4
  Top Layer w10: JP2.3 1838.5,3892 2027.5,3892 2149.2,4013.7 U5.27
U5_28: P4.3 R24.2 U5.28 | length 1599.1
  Top Layer w10: v1(2117.5,3942) 2168.8,3993.3 U5.28 ; R24.2 2867.5,3362 P4.3
  Bottom Layer w10: v1(2117.5,3942) 2117.5,3842 2327.5,3632 2717.5,3632 2867.5,3482 P4.3
U5_29: P4.2 R23.2 U5.29 | length 1643.8
  Top Layer w10: v1(2147.5,3912) 2147.5,3942 2188.52,3983.02 U5.29 ; R23.2 2967.5,3342 P4.2
  Bottom Layer w10: v1(2147.5,3912) 2147.5,3852 2337.5,3662 2747.5,3662 2967.5,3442 P4.2
U5_30: P4.1 U5.30 | length 1491.6
  Top Layer w10: v1(2177.5,3872) 2177.5,3942 2207.5,3972 U5.30@2207.5,4079.3 ; v4(2207.5,4142) 2208.21,4141.29 U5.30
  Bottom Layer w10: v1(2177.5,3872) 2357.5,3692 2767.5,3692 3067.5,3392 P4.1
U5_32: R22.1 U5.32 | length 485.2
  Top Layer w10: R22.1 2207.9,3742 2261.4,3796.7 2261.4,3918.1 2247.6,3931.9 U5.32
U5_33: P5.1 R27.1 U5.33 U8.1 | length 1240.8
  Top Layer w10: U5.33 2267.3,3972.2 v1(2277.5,3962) ; U8.1 2897.5,4003 v1(2897.5,3922) R27.1 2900.58,3882 R27.1@2917.5,3865.08
  Bottom Layer w10: v1(2277.5,3962) 2337.5,3962 2377.5,3922 v1(2897.5,3922) 2897.5,3762 P5.1
U5_34: R28.2 U5.34 U8.6 | length 1259.9
  Top Layer w10: U5.34 2287,4002.5 v1(2297.5,3992) ; U8.6 2997.5,4281 2997.5,4202 3027.5,4172 v1(3107.5,4172) 3117.5,4182 R28.2
  Bottom Layer w10: v1(2297.5,3992) 2357.5,3992 2397.5,3952 2887.5,3952 v1(3107.5,4172)
U5_36: U5.36
U5_39: PJ1.3 R31.2 U5.39 | length 1595.7
  Top Layer w10: U5.39 2379.7,4172 2517.5,4172 2527.5,4162 2777.5,4162 2857.5,4242 v1(2857.5,4732) ; R31.2 3027.5,4832 3027.5,5021.1 PJ1.3
  Bottom Layer w10: v1(2857.5,4732) 2987.5,4732 v1(3037.5,4782)
U5_42: PJ1.5 R32.2 U5.42 | length 1310.7
  Top Layer w10: U5.42 2490.6,4228.9 2537.5,4182 2757.5,4182 2807.5,4232 2807.5,4742 2847.5,4782 R32.2 2927.5,4872 2893.3,4906.2 PJ1.5
U5_44: C17.1 U5.44 | length 218.1
  Top Layer w10: U5.44 2508.8,4268.3 2552.5,4312 2556,4312 C17.1
U5_46: PJ1.4 R30.2 U5.46 | length 1417
  Top Layer w10: U5.46 2453.1,4307.6 2487.5,4342 2487.5,4412 2527.5,4452 2717.5,4452 2767.5,4502 v1(2767.5,4682) ; PJ1.4 3197.5,4953.42 3197.5,4952 3227.5,4922 R30.2
  Bottom Layer w10: v1(2767.5,4682) 3087.5,4682 v1(3187.5,4782)
U5_48: U5.48
VHIGH: C1.1 C18.1 C20.1 JP1.4 JP2.4 pad.2@4097.5,5112 U1.2-4 U2.3 U4.39 U6.3 U7.3 | length 9209.5
  Top Layer w30: C20.1 2225,4912 U7.3@2408,4912 ; C18.1 2233,5113.1 U6.3@2397.5,5112 ; C1.1@2173.6,5248.1 2173.6,5288.1 2197.5,5312 2357.5,5312 U2.3@2397.5,5312 ; U7.3 2668.6,4913.1 2807.5,5052 2807.5,5282 2867.5,5342 4017.5,5342 4097.5,5262 pad.2@4097.5,5112
  Bottom Layer w10: 4977.5,4002 4977.5,3892 U1.2-4
  Bottom Layer w30: U4.39 1727.5,2891.9 1687.6,2852 1587.5,2852 1537.5,2902 1537.5,3742 1605.5,3810 JP2.4 1677.5,4622 1903.6,4848.1 C20.1 ; C20.1 C18.1 C1.1 ; JP1.4 3659.5,4504 3697.5,4542 3697.5,5042 3767.5,5112 4097.5,5112 4677.5,5112 5127.5,4662 5127.5,4152 4977.5,4002
VS1053-CVDD: C10.1 C11.1 C12.1 C13.1 C21.1 U5.5 U5.7 U5.24 U5.31 U7.2 | length 2109.9
  Top Layer w10: C12.1 2007.5,4032 2058.6,4083.1 U5.24 ; U5.24 2146,4130.5 2185.3,4169.8 2237.5,4169.8 ; C11.1 2097.5,4502 2127.5,4472 2187.5,4472 2207.5,4452 2207.5,4342 2217.5,4332 2237.5,4332 ; C10.1 U5.31 2227.9,4122.4 2237.5,4132 2237.5,4332 ; C13.1 2378.08,4522 2317.5,4522 2247.6,4452.1 2247.6,4342.1 2237.5,4332
  Top Layer w30: U7.2 2474.1,4848.08 C21.1
  Bottom Layer w30: v2(2367.5,4522) 2367.5,4732 2483.6,4848.1 C21.1
VS1053-GND: C5.2 C6.2 C7.2 C8.2 C9.2 C10.2 C11.2 C12.2 C13.2 C14.2 C15.2 C16.2 C17.2 C18.2 C19.2 C20.2 C21.2 C22.2 C23.2 C24.2 C25.2 C26.2 JP2.1 P4.10 R23.1 R24.1 R25.1 R26.1 R28.1 R29.1 S6.1 U5.4 U5.16 U5.20 U5.21 U5.22 U5.35 U5.37 U5.40 U5.41 U5.47 U6.1 U7.1 U8.4 | length 10394.6
  Top Layer w10: C16.2 2056.12,4192 U5.21 ; C12.2@1907.5,4112 C12.2 1897.6,4112 1955.1,4169.8 U5.22 ; C15.2@1907.5,4352 C15.2 1937.5,4372 2021.6,4287.9 U5.16 ; 1986.27,4169.8 1986.27,4192 ; 1986.3,4192 1986.3,4200.8 1997.5,4212 2055.8,4212 U5.20 ; U5.4 2267.26,4441.76 2287.5,4462 2477.5,4462 2477.5,4602 C13.2 ; U5.35 2306.6,4032.9 2327.5,4012 2327.5,3942 v2(2307.5,3922) ; U5.37 2339.04,4130.46 2327.5,4142 2327.5,4202 ; U5.40 2340,4189.5 2327.5,4202 ; U5.41 2340.3,4209.2 2327.5,4222 ; U5.47 2332.81,4327.31 2327.5,4322 2327.5,4222 ; 2327.5,4202 2327.5,4222
  Top Layer w30: C5.2 1817.5,4112 v2(1837.5,4112) C12.2 ; C6.2 1787.5,4422 v2(1837.5,4372) C15.2 ; v2(1837.5,4192) C16.2 ; C11.2 v2(2097.5,4642) ; C22.2 R23.1 R24.1 R25.1 R26.1 ; C14.2 v2(2227.5,4642) v2(2417.5,4642) C13.2 ; C20.2 2341.82,4848.08 U7.1 ; C18.2 2341.82,5048.08 U6.1 2427.9,4962 2577.5,4962 2647.96,5032.46 C19.2 ; 2307.5,3542 C10.2 ; 2377.5,4122 2377.5,3992 v2(2307.5,3922) C10.2 ; C9.2 v2(2707.5,4117) 2707.5,3952 v2(2627.5,3872) C10.2 ; C7.2 v2(2707.5,4232) ; C8.2 v2(2707.5,4387) ; R23.1@2851.6,3538 3183.5,3538 3247.5,3602 3247.5,3762 R29.1@3127.5,3882 ; R29.1 C23.2 3042.5,3882 U8.4 3118.5,4003 3147.5,4032 R28.1 ; C17.2 v2(2707.5,4312) C17.2
  Bottom Layer w30: JP2.1 2077,3574 S6.1 2077,3582.5 2117.5,3542 C22.2 2167.5,3542 2167.5,3332 P4.10 ; v2(1837.5,4112) v2(1837.5,4192) v2(1837.5,4372) 1837.5,4522 1957.5,4642 v2(2097.5,4642) v2(2227.5,4642) 2227.5,4822 C20.2 ; C20.2 C18.2 ; v2(2417.5,4642) 2497.5,4642 2707.5,4432 ; C21.2 C19.2 ; v2(2707.5,4117) 2707.5,4192 v2(2707.5,4232) v2(2707.5,4312) v2(2707.5,4387) ; v2(3227.5,4462) v2(3077.5,4462) v2(2927.5,4462) 2737.5,4462 2707.5,4432 ; v2(2707.5,4387) 2707.5,4432 ; v2(2707.5,4387) 2707.5,4432
  other v1: 1727.5,3342 1827.5,3342 1927.5,3342 2027.5,3342 1727.5,3442 1827.5,3442 2927.5,3642 2427.5,3742 2527.5,3742 2627.5,3742 2727.5,3742 2827.5,3742 2727.5,3842 2827.5,3842 1627.5,3942 3227.5,3942 1727.5,4042 3227.5,4042 3227.5,4142 3227.5,4242 3127.5,4342 3227.5,4342 1627.5,4542 1727.5,4542 2727.5,4542 1827.5,4642 2627.5,4642 2727.5,4642 1927.5,4742 2027.5,4742 2127.5,4742 2527.5,4742 2627.5,4742 2727.5,4742 2727.5,5142 2927.5,5142 2027.5,5242 2927.5,5242 2027.5,5342
VS1053-IOVDD: C7.1 C8.1 C9.1 C14.1 C15.1 C16.1 C19.1 C23.1 R21.2 R22.2 R27.2 R33.2 U5.6 U5.14 U5.19 U5.38 U5.43 U5.45 U6.2 U8.3 U8.7 U8.8 | length 5344
  Top Layer w10: C16.1 v2@1937.5,4272 ; C15.1 v2(1927.5,4452) 1937.5,4452 1987.5,4402 1987.5,4352 2012.19,4327.31 U5.14 ; v2(1927.5,4272) 1970.61,4228.89 U5.19 ; C14.1 v2(2227.63,4481.87) U5.6 ; U5.38@2377.5,4150.15 2504.35,4150.15 v2(2537.5,4117) C9.1 ; U5.43 2520.93,4248.57 v2(2537.5,4232) C7.1 ; U5.45 2498.44,4287.94 2517.5,4307 2517.5,4367 v2(2537.5,4387) C8.1 ; R27.2 C23.1 ; 2956.3,3802 2957.5,3803.2 2957.5,3932 2992.5,3967 U8.3
  Top Layer w30: R33.2 1867.5,3822 v2(1927.5,3822) R21.2 R22.2 ; C16.1 v2(1927.5,4272) ; C15.1 v2(1927.5,4452) ; U6.2 2474.1,5048.08 C19.1 ; v2(2537.5,4117) C9.1 ; v2(2537.5,4232) C7.1 ; v2(2537.5,4387) C8.1 ; U8.8 2892.5,4222 v1(2887.5,4222) 2942.5,4221.7 ; U8.7 2942.5,4197 2992.5,4147 U8.3
  Bottom Layer w30: v2(1927.5,3822) v2(1927.5,4272) v2(1927.5,4452) 1957.37,4481.87 v2(2227.63,4481.87) ; v2(2227.63,4481.87) 2287.6,4481.9 2382.5,4387 v2(2537.5,4387) v2(2537.5,4232) v2(2537.5,4117) 2582.5,4072 2737.5,4072 v1(2887.5,4222) ; 2288.97,4481.9 2288.97,4769.1 C19.1
XCD: P1.9 P6.9 R10.1 | length 511.8
  Top Layer w10: P1.9 4417.5,1642 4547.5,1642 4587.5,1602 R10.1 ; R10.1@4597.5,1592 R10.1 ; P6.9 4719.7,1674.2 4637.5,1592 R10.1
XCS0: R1.1 U1.4-5 U3.1 | length 1208.5
  Top Layer w10: U1.4-5 3867.5,3482 3867.5,3322 3897.5,3292 4363.5,3292 U3.1 4487.5,3038.02 R1.1
XRST: C4.1 R19.1 S5.2 U1.2-8 | length 2695.8
  Top Layer w10: S5.2 4097.5,1852 C4.1 4097.5,2022 4167.5,2092 R19.1 ; v1(4827.5,3202) U1.2-8
  Bottom Layer w10: C4.1 4097.5,2022 4177.5,2102 4177.5,2752 4627.5,3202 v1(4827.5,3202)
pads on no net: P2.15 P2.16 P2.17 P6. P6.10 P6.11 P6.GND PJ1. S1.3 S1.4 S2.3 S2.4 S3.3 S3.4 S4.3 S4.4 S5.3 S5.4 S6.3 S6.4
copper on no net:
  other v3: 1724.35,1701.85 5267.65,1701.85 1724.35,5245.15 5267.65,5245.15

## Polygon pours and split planes (outlines as drawn)
VS1053-GND on Bottom Layer (solid): 3327.5,5442 1527.5,5442 1527.5,3152 1537.5,3142 3327.5,3142 3327.5,5442
GND on Bottom Layer (solid): 1537.5,1502 1527.5,1512 1527.5,2932 1537.5,2942 3327.5,2942 3327.5,5432 3337.5,5442 5467.5,5442 5467.5,1502 1537.5,1502
VS1053-GND on Top Layer (solid): 1527.5,5442 1527.5,3152 1537.5,3142 3327.5,3142 3327.5,5442 1547.5,5442 1537.5,5432
GND on Top Layer (solid): 3327.5,5442 5467.5,5442 5467.5,1502 1537.5,1502 1527.5,1512 1527.5,2932 1537.5,2942 3337.5,2942 3337.5,5422 3327.5,5432

## Silkscreen, mask and mechanical layers (free items; w line width, h text height)
Top Overlay:
  text "JLCJLCJLCJLC" at 4807.5,2684.5 h35
  text "VS1005BOB" at 2327.5,2617 h50
  text "VS1053" at 2327.5,2517 h50
  text "YD_RP2040" at 2327.5,2417 h50

## Text inside footprints (layer, text, board x,y; h text height)
JP1: Document "RX" at 3482.5,4682 h30 r270; Document "TX" at 3482.5,4602 h30 r270; Document "+5V" at 3482.5,4522 h30 r270; Document "GND" at 3482.5,4792 h30 r270
JP2: Document "RX" at 1812.5,3632 h30 r90; Document "TX" at 1812.5,3712 h30 r90; Document "+5V" at 1812.5,3792 h30 r90; Document "GND" at 1812.5,3522 h30 r90
JP3: Document "RX" at 3652.5,4562 h30 r90; Document "TX" at 3652.5,4642 h30 r90; Document "+5V" at 3652.5,4722 h30 r90; Document "GND" at 3652.5,4452 h30 r90
P2: Bottom Overlay "1" at 4948.34,4223.62 h59.05 r270; Bottom Overlay "14" at 4948.34,4583.62 h59.05 r270
P3: Top Overlay "14" at 3952.5,5092 h40 r90; Top Overlay "13" at 4052.5,5092 h40 r90; Top Overlay "1" at 4007.76,4272.11 h40 r270; Top Overlay "2" at 3907.76,4272.11 h40 r270